# EAGLE board USV-BG-002-SP-A (EAGLE 9.6.2)
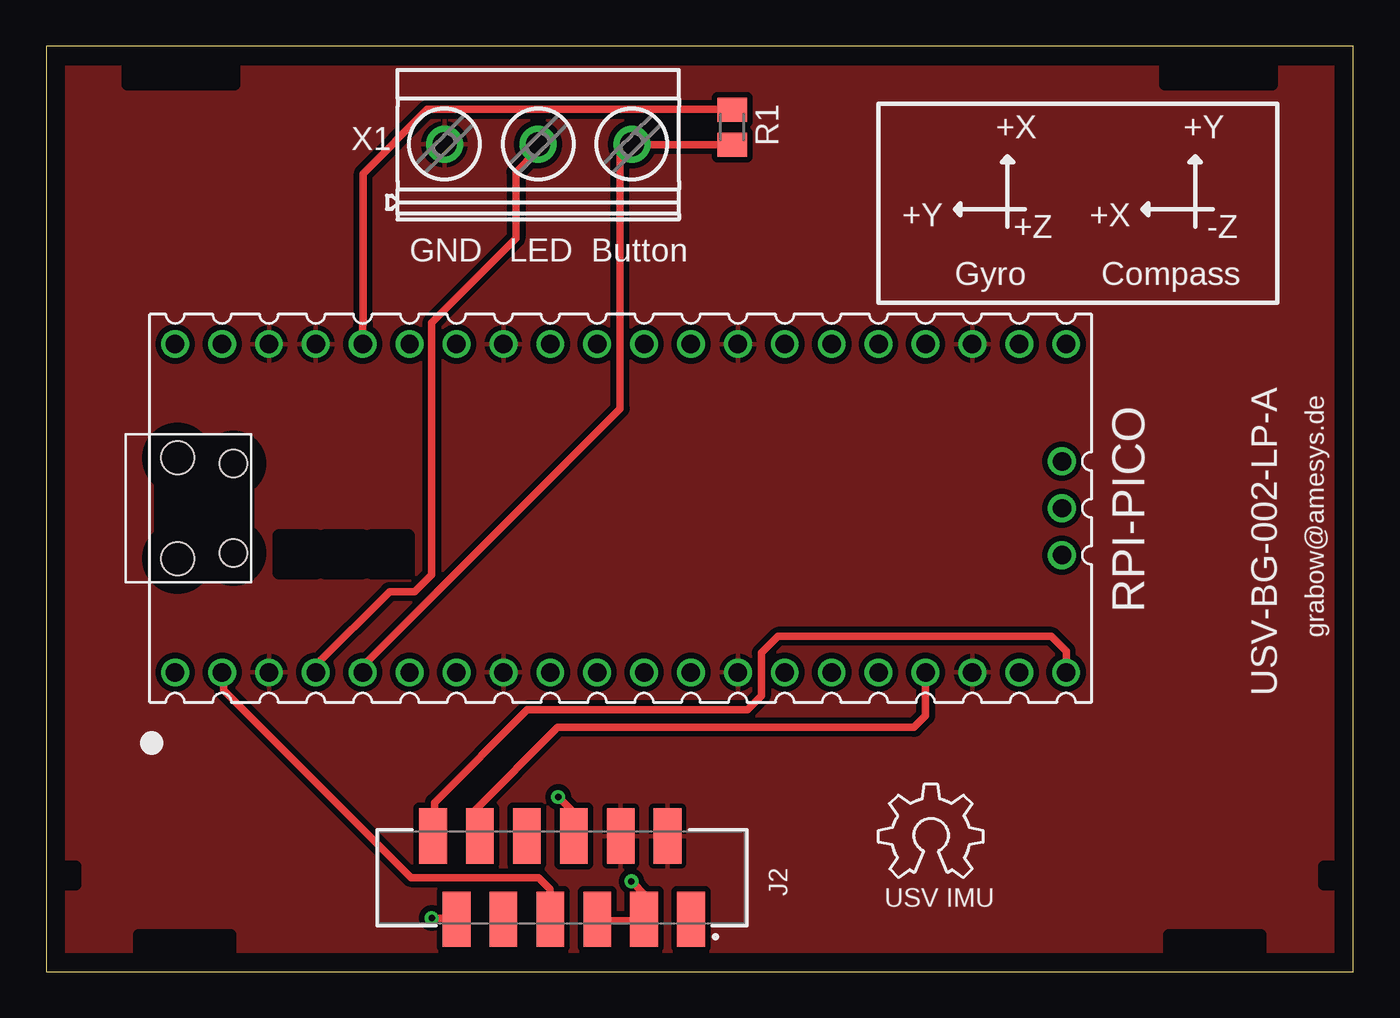
[diagram p0: board, top side]
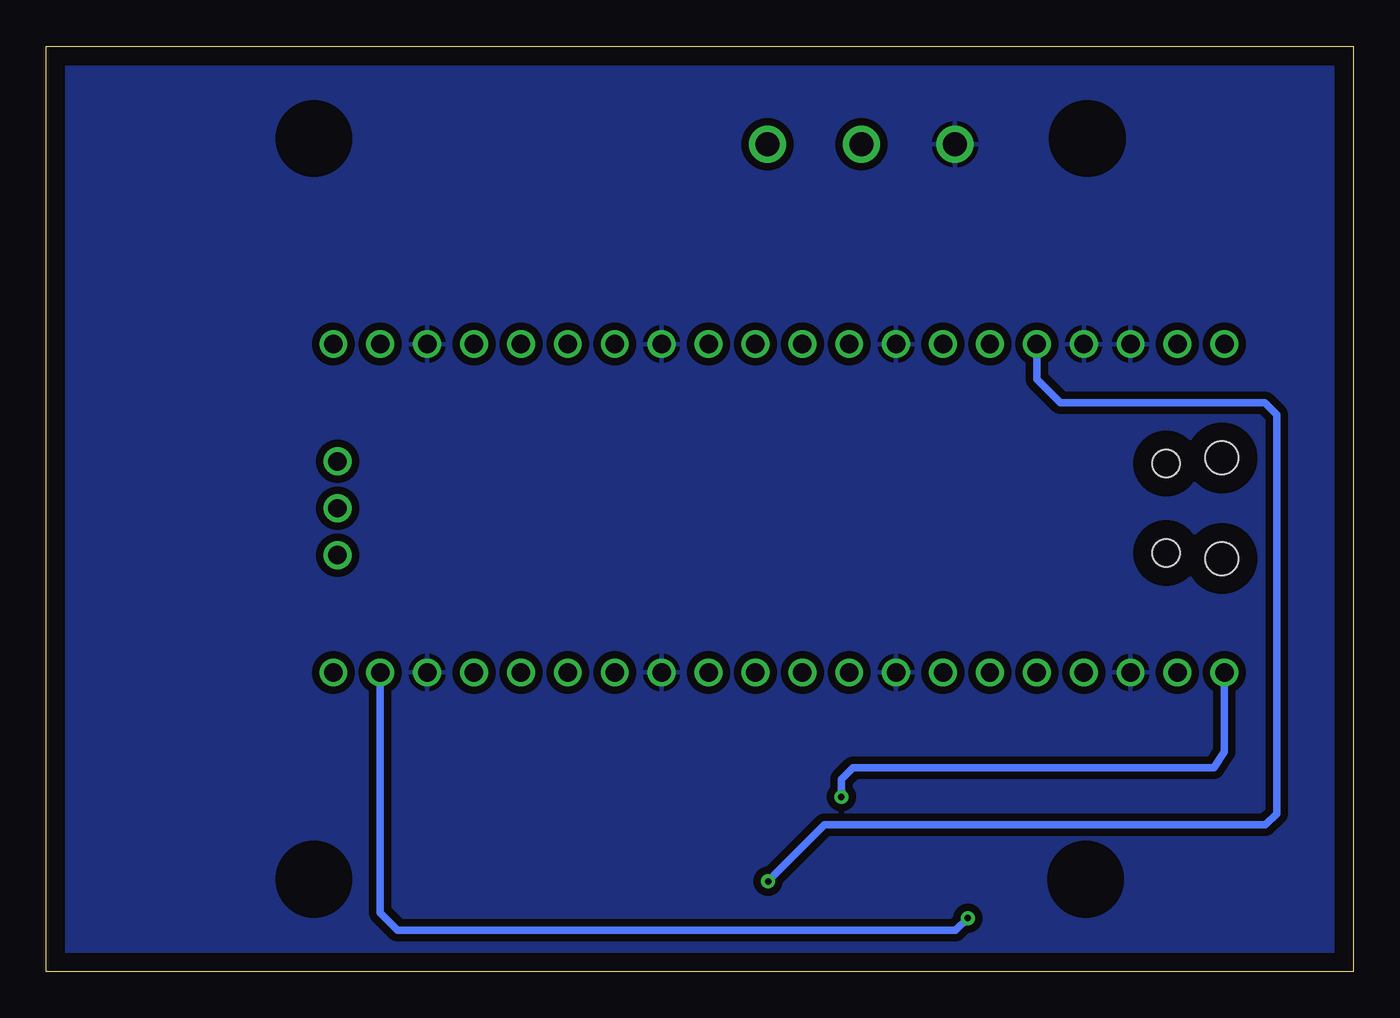
[diagram p1: board, bottom side, seen from below]

Size 70.8 x 50.1 mm. Coordinates in mm from the lower left corner, seen from the top.
Outline: 0,0 70.8,0 70.8,50.1 0,50.1 0,0
Copper layers (1*16): Top 0.035mm / dielectric 1.5mm / Bottom 0.035mm
Design rules "default": minimum track width 6mil, minimum drill 0.35mm, track to track 6mil, track to pad 6mil, pad to pad 6mil, via to via 6mil, smd to smd 6mil, copper to edge 40mil, drill to drill 6mil, minimum pad ring 10mil, minimum via ring 8mil, stop-mask expansion 4mil, vias tented up to drill 0mil, thermal gap 10mil
tRestrict: area 5,0 to 10,2; area 60.8,0 to 65.8,2; area 60.6,48 to 66.4,50; area 4.4,48 to 10.2,50; area 0,4.7 to 1.6,5.7; area 69.2,4.7 to 70.8,5.7
bRestrict: area 12.9,3.4 to 16.1,6.6; area 54.7,3.4 to 57.9,6.6; area 12.8,43.5 to 16,46.7; area 54.7,43.5 to 57.9,46.7

## Footprints (pad centres in the part's own frame; a part is rotated, then mirrored left to right if it is on the bottom)
690367291276 = smd 1.5 x 3: 1 6.985,-2.25; 2 5.715,2.25; 3 4.445,-2.25; 4 3.175,2.25; 5 1.905,-2.25; 6 0.635,2.25; 7 -0.635,-2.25; 8 -1.905,2.25; 9 -3.175,-2.25; 10 -4.445,2.25; 11 -5.715,-2.25; 12 -6.985,2.25
M0805 = smd 1.3 x 1.6: 1 -0.95,0; 2 0.95,0
PICO-PKG-TH = drill 1: 1 -8.89,24.13; 2 -8.89,21.59; 3 -8.89,19.05; 4 -8.89,16.51; 5 -8.89,13.97; 6 -8.89,11.43; 7 -8.89,8.89; 8 -8.89,6.35; 9 -8.89,3.81; 10 -8.89,1.27; 11 -8.89,-1.27; 12 -8.89,-3.81; 13 -8.89,-6.35; 14 -8.89,-8.89; 15 -8.89,-11.43; 16 -8.89,-13.97; 17 -8.89,-16.51; 18 -8.89,-19.05; 19 -8.89,-21.59; 20 -8.89,-24.13; 21 8.89,-24.13; 22 8.89,-21.59; 23 8.89,-19.05; 24 8.89,-16.51; 25 8.89,-13.97; 26 8.89,-11.43; 27 8.89,-8.89; 28 8.89,-6.35; 29 8.89,-3.81; 30 8.89,-1.27; 31 8.89,1.27; 32 8.89,3.81; 33 8.89,6.35; 34 8.89,8.89; 35 8.89,11.43; 36 8.89,13.97; 37 8.89,16.51; 38 8.89,19.05; 39 8.89,21.59; 40 8.89,24.13; 41 -2.54,-23.9; 42 0,-23.9; 43 2.54,-23.9 | hole 1.8: -2.725,24; 2.725,24 | hole 1.5: -2.425,20.97; 2.425,20.97
MKDSN1,5/3-5,08 = drill 1.3 pad 2: 1 -7.641,0.025; 2 -2.561,0.025; 3 2.519,0.025

## Placement (x,y rotation side)
J2  690367291276  [690367291276]  27.94,5.08 0 top
R1  10k  [M0805]  37.15,45.72 270 top
RPI-PICO  RASPBERRY_PICOTH  [PICO-PKG-TH]  31.11,25.08 90 top
U$1  [OSHW_6X200_NOTEXT]  45.09,5.08 0 top
X1  MKDSN1,5/3-5,08  [MKDSN1,5/3-5,08]  29.21,44.77 0 top

## Library data of the parts
J2 = Eagle_WR-MM (rev20b); DATASHEET-URL: https://www.we-online.com/catalog/datasheet/690367291276.pdf; GENDER: Female; IR: 1.5A; PACKAGING: Tape and Reel; PART-NUMBER: 690367291276; PINS: 12; PITCH: 2.54; TYPE: Straight
R1 = rcl; SPICEPREFIX: R
RPI-PICO = RpiPico
U$1 = ohw-logo
X1 = con-phoenix-508

## Nets
+3V3: J2.3 J2.5 R1.1 RPI-PICO.36
+5V: J2.1
ERROR1: J2.11 RPI-PICO.19
ERROR2: J2.12 RPI-PICO.20
GND: J2.2 J2.4 RPI-PICO.3 RPI-PICO.8 RPI-PICO.13 RPI-PICO.18 RPI-PICO.23 RPI-PICO.28 RPI-PICO.33 RPI-PICO.37 RPI-PICO.38 X1.1
IRQ: J2.10 RPI-PICO.17
LED/IO2: RPI-PICO.4 X1.2
SWGND: RPI-PICO.42
TA/IO3: R1.2 RPI-PICO.5 X1.3
UART0_RX: J2.7 RPI-PICO.2
UART0_TX: J2.6 RPI-PICO.1
VBUS: RPI-PICO.40
VSYS: RPI-PICO.39

## Tracks (layer width: path | path; a pad name or v marks a point on that pad's centre or on a via)
+3V3  (via drill 0.35)
  Top 0.152: 32.46,3.66 32.46,2.9 J2.3 | 32.46,4.12 32.46,3.66 | 32.46,3.66 J2.3 | 29.87,2.74 J2.5 | 32.31,2.74 J2.3
  Top 0.406: v31.7,4.88 32.46,4.12 | RPI-PICO.36 17.14,35.03 17.17,35.05 17.17,43.2 20.64,46.67 R1.1 | 32.31,2.74 29.87,2.74
  Bottom 0.406: RPI-PICO.36 17.14,32.07 15.88,30.8 4.81,30.8 4.16,30.14 4.16,8.54 4.76,7.94 28.64,7.94 v31.7,4.88
+5V
  Top 0.152: 34.44,3.35 34.9,2.9 J2.1 34.44,3.35
ERROR1  (via drill 0.35)
  Top 0.152: J2.11 22.25,2.9 22.71,3.35 J2.11 | 22.1,2.9 J2.11
  Top 0.406: v20.88,2.9 22.1,2.9
  Bottom 0.406: RPI-PICO.19 52.7,3.17 51.75,2.22 24.69,2.22 21.55,2.22 v20.88,2.9
ERROR2
  Top 0.152: 21.03,7.47 21.03,8.23 J2.12 21.03,7.47
  Top 0.406: 21.03,8.23 21.03,9.14 26.05,14.16 37.97,14.16 38.73,14.92 38.73,17.25 39.64,18.15 54.45,18.15 55.24,17.35 RPI-PICO.20
GND
  Top 0.152: 31.24,7.32 J2.4 31.24,7.47 | 33.53,7.32 J2.2 33.68,7.32
  pour Top (isolate 0.305): 0,49.53 71.12,49.53 71.12,48.26 71.12,0 0,0
  pour Bottom (isolate 0.406): 0,49.53 71.12,49.53 71.12,0 0,0
IRQ
  Top 0.152: 23.16,7.77 23.47,7.47 J2.10 23.16,7.77 | 23.16,8.69 23.16,7.77
  Top 0.406: 23.16,8.69 27.7,13.22 47,13.22 47.62,13.84 RPI-PICO.17
LED/IO2
  Top 0.152: 14.63,16.61 14.63,16.31 RPI-PICO.4
  Top 0.406: 14.63,16.61 18.59,20.57 19.96,20.57 20.88,21.49 20.88,35.12 25.45,39.69 25.45,43.28 26.52,44.35 26.52,44.65 X1.2
TA/IO3
  Top 0.152: 17.22,16.61 17.22,16.31 RPI-PICO.5
  Top 0.406: 17.22,16.61 31.09,30.48 31.09,44.15 31.74,44.81 | 31.74,44.81 X1.3 | R1.2 31.78,44.77 31.74,44.81
UART0_RX
  Top 0.152: 9.6,16.15 RPI-PICO.2 | 27.28,2.9 J2.7 27.28,2.9
  Top 0.406: 9.6,16.15 9.6,15.24 19.76,5.08 26.67,5.08 27.3,4.45 J2.7
UART0_TX  (via drill 0.35)
  Top 0.152: 28.5,7.47 J2.6 28.5,7.47 | 28.5,8.69 28.5,7.47
  Top 0.406: v27.74,9.45 28.5,8.69
  Bottom 0.406: v27.74,9.45 27.74,10.4 27.1,11.04 7.57,11.04 6.99,11.91 RPI-PICO.1

## Text on the board
tNames: +X | +Y | +Y | +Z | +X | -Z | GND | LED | Button | Gyro | Compass | grabow@amesys.de | USV-BG-002-LP-A | USV IMU